# Altium PCB interface_com_usuario.PcbDoc
Units mm, origin at the board's own origin, x right, y up, seen from the top; angles counter-clockwise.
Board outline 65.02 x 100.08 mm, 2 copper layers (Top Layer, Bottom Layer); 31 components, 39 nets, 130 pads, 23 vias.
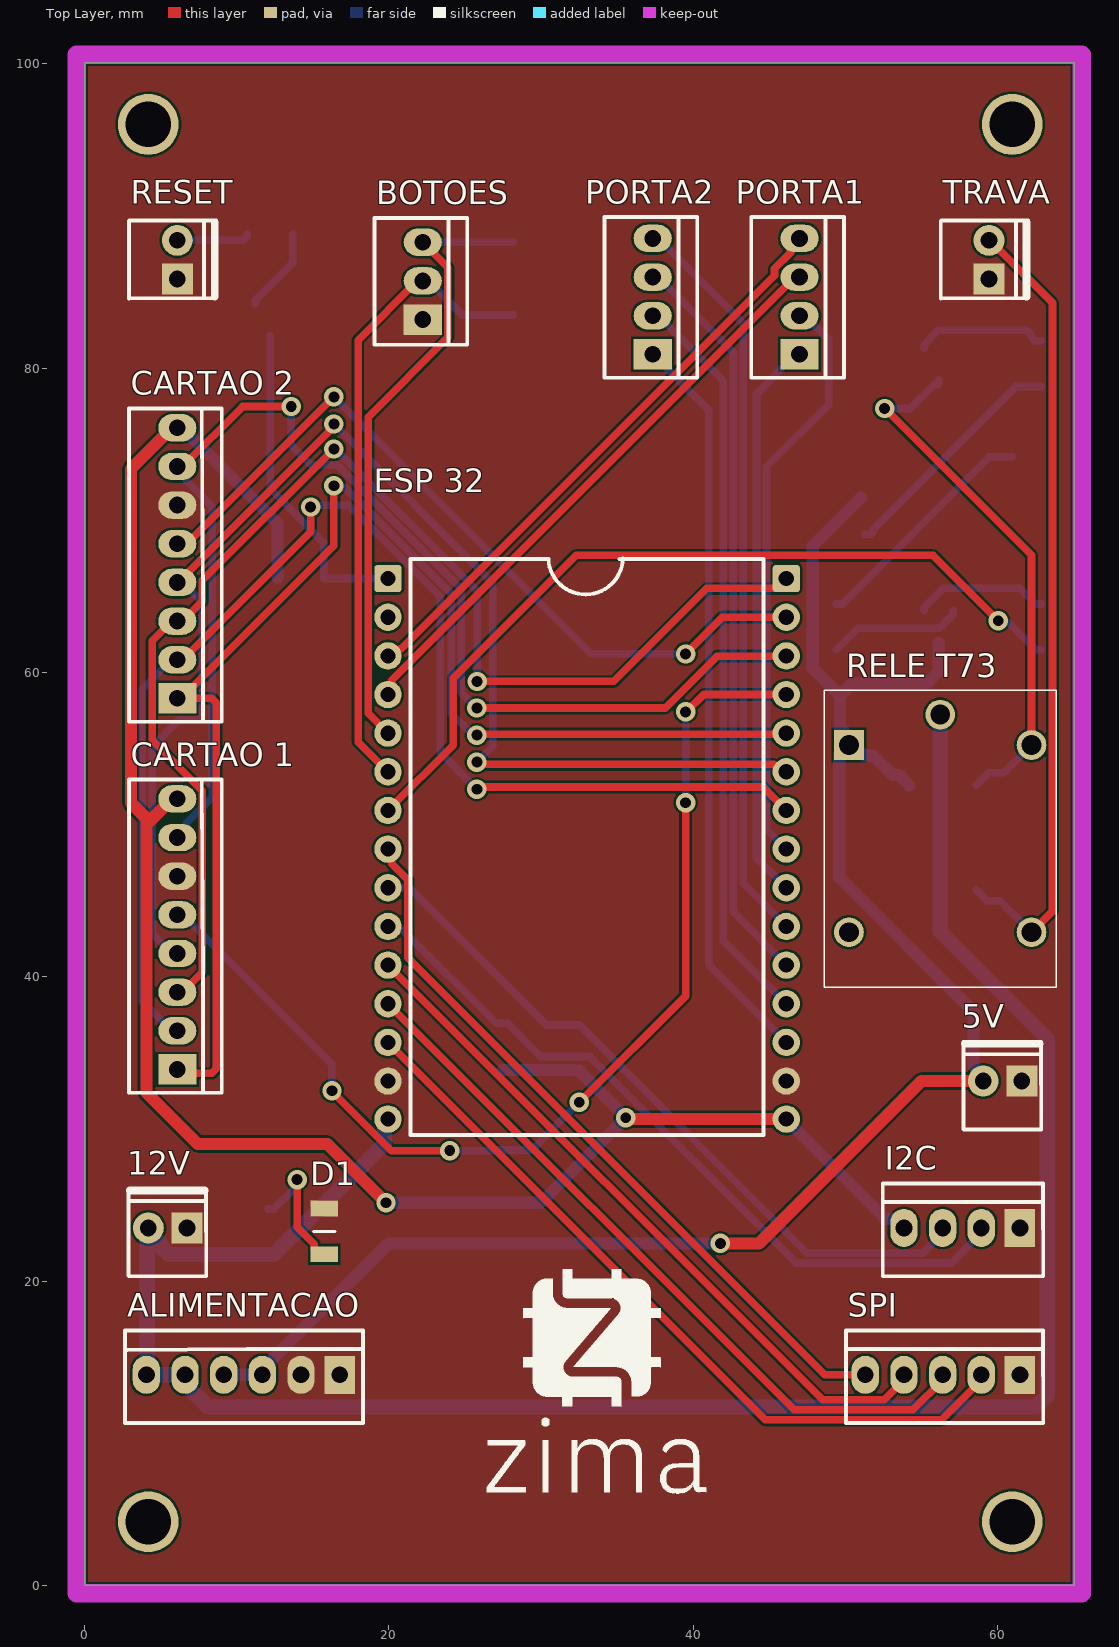
[diagram p0: Top Layer view]
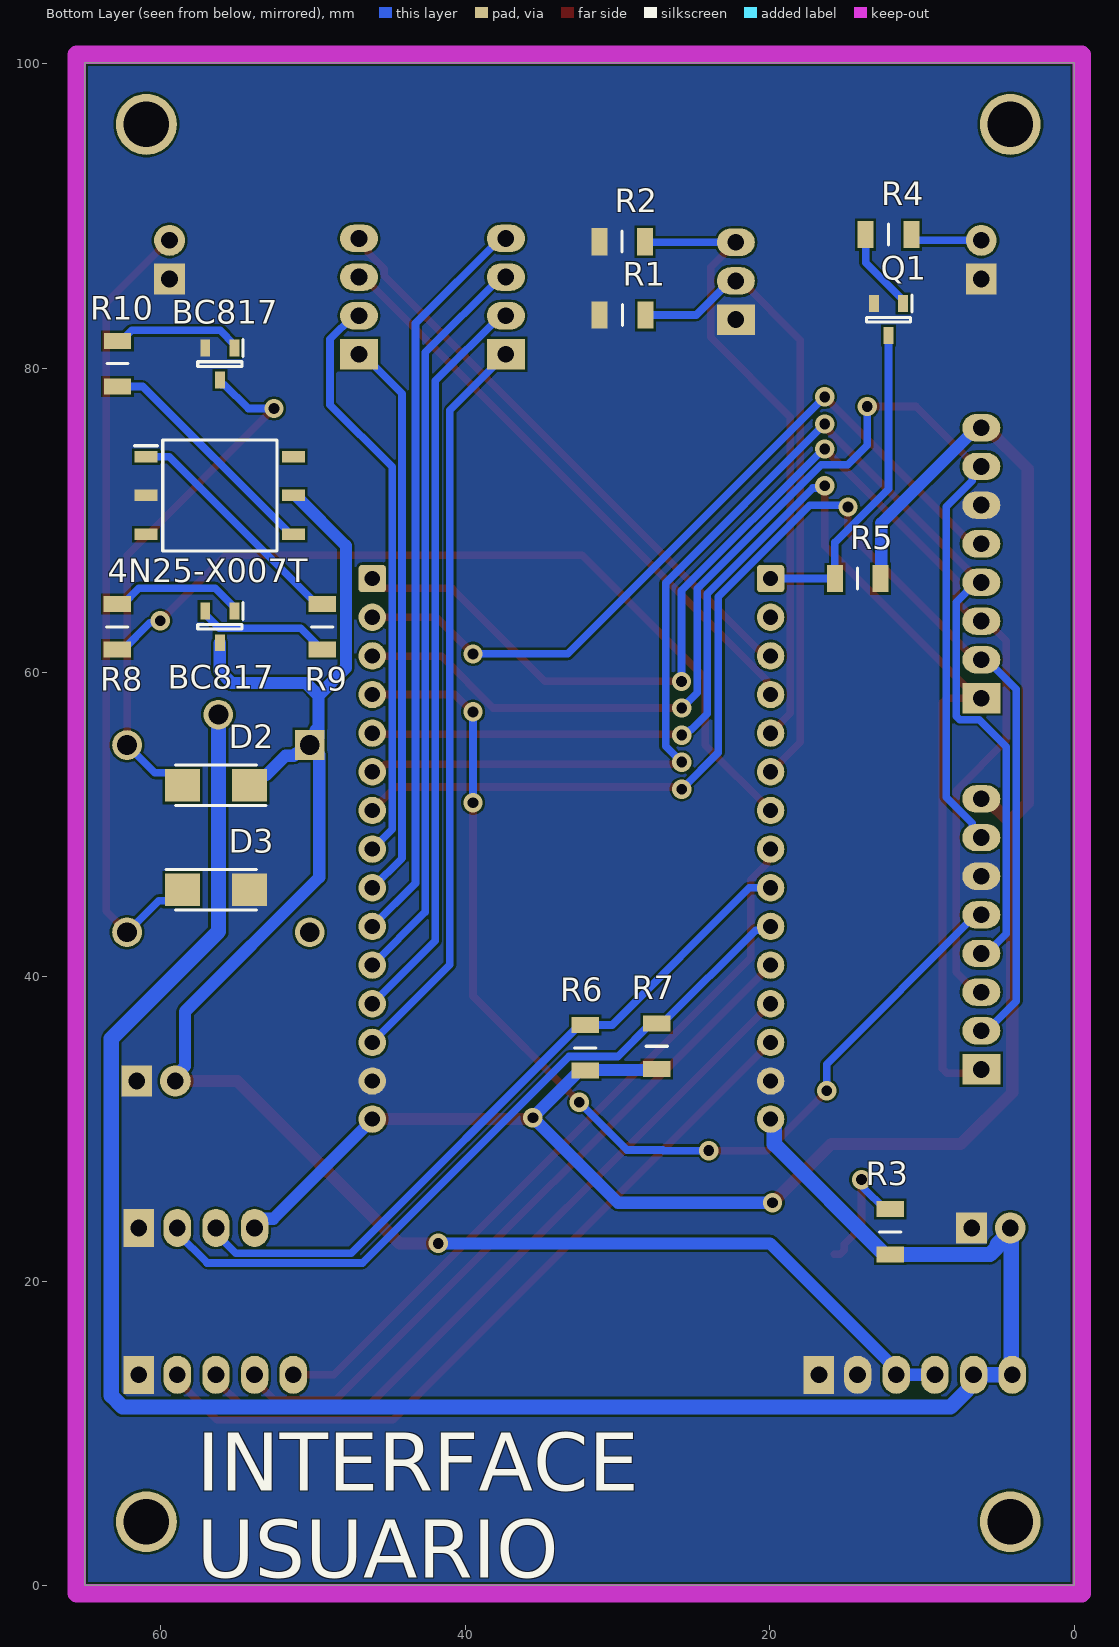
[diagram p1: Bottom Layer view, seen from below]

## Layer stack, top to bottom
Top Solder: solder mask 0.0102, Solder Resist, Dk 3.5
Top Layer: signal copper 0.0356
Dielectric 1: dielectric 0.32, FR-4, Dk 4.8
Bottom Layer: signal copper 0.0356
Bottom Solder: solder mask 0.0102, Solder Resist, Dk 3.5

## Board outline
0,0 65.024,0 65.024,100.076 0,100.076

## Design rules (kind name [scope] priority, off if disabled: settings)
Clearance [All] p1: gap=0.152 ignorepadtopadclearanceinfootprint=FALSE except(0: Arc-Hole Track-Hole SMDPad-Hole THPad-Hole Via-Hole Fill-Hole Poly-Hole Region-Hole Text-Hole)
ComponentClearance [All] p1: gap=0.1 collisioncheckmode=3 verticalgap=0.1 showdistances=FALSE
HoleSize [All] p1: absolutevalues=TRUE maxlimit=3 minlimit=0.025 maxpercent=80.000 minpercent=20.000
MinimumSolderMaskSliver [All] p1: minsoldermaskwidth=0.1
PolygonConnect [All] p1: connectstyle=Direct reliefconductorwidth=0.254 reliefentries=4 polygonreliefangle="90 Angle" airgapwidth=0.254
RoutingVias [All] p1: holewidth=0.4 width=0.8 viastyle="Through Hole" minholewidth=0.3 minwidth=0.6 maxholewidth=0.5 maxwidth=1
SilkToSilkClearance [All] p1: silktosilkclearance=0
SilkToSolderMaskClearance [IsPad] p1: minsilkscreentomaskgap=0 clearancetoexposedcopper=TRUE
SolderMaskExpansion [All] p1: expansion=0.08 istentingtop=FALSE
Width [All] p1: maxlimit=1 minlimit=0.3 preferedwidth=0.5
25 further rules are at their usual default settings.

## Classes and differential pairs
component class U_interface_com_usuario_motor_cartao: 4N25-X007T BC817 D2 D3 PORTA1 PORTA2 R8 R9 R10 "RELE T73" TRAVA
component class U_interface_com_usuario_comunicacao: I2C R6 R7 SPI
component class U_interface_com_usuario_alimentacao: 5V 12V ad ALIMENTACAO D1 Q1 R3 R4 R5 RESET
component class interface_com_usuario: BOTOES "CARTAO 1" "CARTAO 2" "ESP 32" R1 R2

## Components (designator, comment, footprint, x,y, rotation, side; value= is the part's Value field where it differs from the comment)
4N25-X007T "4N25-X007T" SOP254P1030X440-6N 56.134,71.628 r180 bottom
5V "KK_2.54_2vias" KK_2VIAS_180º 61.595,33.147 r180 top
12V "KK_2.54_2vias" KK_2VIAS_180º 6.731,23.495 r180 top
ALIMENTACAO "KK_2.54_6vias" KK_6vias_180° 16.764,13.843 r180 top
BC817 "Trans BC817" SOT96P240X110-3N 56.134,80.264 r270 bottom
BC817 "Trans BC817" SOT96P240X110-3N 56.134,62.992 r270 bottom
BOTOES "KK_2.54_3vias" KK_3vias_180º 22.225,83.185 r90 top
"CARTAO 1" "KK_2.54_8vias" KK_8vias_180° 6.096,33.909 r90 top
"CARTAO 2" "KK_2.54_8vias" KK_8vias_180° 6.096,58.293 r90 top
D1 "LED 3MM RED" "LED RED" 15.748,23.265 r90 top
D2 "1N4007 smd" DIOM5327X242N 56.388,52.578 r0 bottom
D3 "1N4007 smd" DIOM5327X242N 56.388,45.72 r180 bottom
"ESP 32" "microcontrolador" ESP32_Desvikit_v1 19.939,66.167 r0 top value="ESP32 Desvikit V1"
I2C "KK_2.54_4vias" KK_4vias_180° 61.468,23.495 r180 top
PORTA1 "KK_2.54_4vias" KK_4vias_180° 46.99,80.899 r90 top
PORTA2 "KK_2.54_4vias" KK_4vias_180° 37.338,80.899 r90 top
Q1 "Trans BC817" SOT96P240X110-3N 12.192,83.185 r270 bottom
R1 "47k" RESC3216X60N 29.669,83.485 r180 bottom
R2 "47k" RESC3216X60N 29.693,88.311 r180 bottom
R3 "680R" RESC3216X60N 12.072,23.241 r90 bottom
R4 "2k2" RESC3216X60N 12.192,88.773 r180 bottom
R5 "2k2" RESC3216X60N 14.224,66.167 r180 bottom
R6 "4k7" RESC3216X60N 32.124,35.33 r270 bottom
R7 "4k7" RESC3216X60N 27.425,35.433 r270 bottom
R8 "1k" RESC3216X60N 62.872,62.992 r90 bottom
R9 "100R" RESC3216X60N 49.403,62.992 r270 bottom
R10 "1k" RESC3216X60N 62.858,80.288 r270 bottom
"RELE T73" "rele T73" JQC3FT731Z12VDC 50.23,55.226 r270 top
RESET "KK_2.54_2vias" KK_2VIAS_180º 6.096,85.852 r90 top
SPI "KK_2.54_5vias" KK_5vias_180° 61.468,13.843 r180 top
TRAVA "KK_2.54_2vias" KK_2VIAS_180º 59.436,85.852 r90 top

## Footprints (in the part's own frame and the unit in brackets; to place one, negate y for a bottom-side part, rotate by r counter-clockwise, add the part's x,y. Pads: shape width x height; smd on the part's side, far side on the other; paste and mask are expansions set on the pad)
DIOM5327X242N [mm]
  rect 2.3x2.15 smd: 1(-2.2,0) 2(2.2,0)
  silkscreen extent -3.27,-1.34 2.65,1.34, body extent -2.65,-1.34 2.65,1.34, height 2.42
ESP32_Desvikit_v1 [mm]
  rrect25% 1.8x1.8 hole 1: 1(0,0) 30(26.175,0)
  round 1.8 hole 1: 2(0,-2.54) 3(0,-5.08) 4(0,-7.62) 5(0,-10.16) 6(0,-12.7) 7(0,-15.24) 8(0,-17.78) 9(0,-20.32) 10(0,-22.86) 11(0,-25.4) 12(0,-27.94) 13(0,-30.48) 14(0,-33.02) 15(0,-35.52) 16(26.175,-35.52) 17(26.175,-33.02) 18(26.175,-30.48) 19(26.175,-27.94) 20(26.175,-25.4) 21(26.175,-22.86) 22(26.175,-20.32) 23(26.175,-17.78) 24(26.175,-15.24) 25(26.175,-12.7) 26(26.175,-10.16) 27(26.175,-7.62) 28(26.175,-5.08) 29(26.175,-2.54)
  silkscreen extent 1.47,-36.57 24.69,1.31, body extent -1.2,-46.03 27.4,4.9, height 15.1
JQC3FT731Z12VDC [mm]
  rect 1.95x1.95 hole 1.3: 1(0,0)
  round 1.95 hole 1.3: 2(-2,6) 3(0,12) 4(12.3,0) 5(12.3,12)
  silkscreen extent -3.6,-1.62 15.9,13.62, body extent -3.6,-1.62 15.9,13.62, height 15.6
KK_2VIAS_180º [mil]
  rect 80x80 hole 43.31: 1(0,0)
  round 80 hole 43.31: 2(100,0)
  silkscreen extent -50,-101 151,125, body extent -61,-108 165,128, height 464
KK_3vias_180º [mm]
  rect 2x2.5 hole 1.1: 1(0,0)
  oval 1.8x2.5 hole 1.1: 2(2.54,0) 3(5.08,0)
  silkscreen extent -1.65,-2.92 6.69,3.18, body extent -1.6,-2.95 6.69,3.05, height 11.9
KK_4vias_180° [mm]
  rect 2x2.5 hole 1.1: 1(0,0)
  oval 1.8x2.5 hole 1.1: 2(2.54,0) 3(5.08,0) 4(7.62,0)
  silkscreen extent -1.53,-2.92 9.02,3.18, body extent -1.4,-2.79 8.76,3.01, height 10.12
KK_5vias_180° [mm]
  rect 2x2.5 hole 1.1: 1(0,0)
  oval 1.8x2.5 hole 1.1: 2(2.54,0) 3(5.08,0) 4(7.62,0) 5(10.16,0)
  silkscreen extent -1.53,-2.92 11.43,3.18, body extent -1.4,-2.79 11.3,3.01, height 10.12
KK_6vias_180° [mm]
  rect 2x2.5 hole 1.1: 1(0,0)
  oval 1.8x2.5 hole 1.1: 2(2.54,0) 3(5.08,0) 4(7.62,0) 5(10.16,0) 6(12.7,0)
  silkscreen extent -1.53,-2.92 14.11,3.18, body extent -1.4,-2.79 13.84,3.05, height 10.1
KK_8vias_180° [mm]
  rect 2x2.5 hole 1.1: 1(0,0)
  oval 1.8x2.5 hole 1.1: 2(2.54,0) 3(5.08,0) 4(7.62,0) 5(10.16,0) 6(12.7,0) 7(15.24,0) 8(17.78,0)
  silkscreen extent -1.53,-2.92 19.05,3.18, body extent -1.4,-2.74 18.92,3.1, height 10.1
"LED RED" [mm]
  rect 1.05x1.8 smd: 1(-1.5,0) 2(1.5,0)
  silkscreen extent 0,-0.7 0,0.7, body extent -0.79,-0.43 0.81,0.37, height 0.75
RESC3216X60N [mm]
  rect 1.05x1.8 smd: 1(-1.5,0) 2(1.5,0)
  silkscreen extent 0,-0.7 0,0.7, body extent -1.57,-0.8 1.58,0.8, height 0.6
SOP254P1030X440-6N [mm]
  rect 1.5x0.75 smd: 1(-4.85,2.54) 2(-4.85,0) 3(-4.85,-2.54) 4(4.85,-2.54) 5(4.85,0) 6(4.85,2.54)
  silkscreen extent -5.6,-3.65 3.75,3.65, body extent -5.15,-3.65 5.15,3.65, height 4.4
SOT96P240X110-3N [mm]
  rect 1.1x0.65 smd: 1(-1.05,0.96) 2(-1.05,-0.96) 3(1.05,0)
  silkscreen extent -1.6,-1.45 0.15,1.54, body extent -1.2,-1.45 1.2,1.45, height 1.1

## Part data
4N25-X007T: "Phototransistor", Manufacturer_Name=Vishay, Mouser Part Number=782-4N25-X007T, Arrow Part Number=4N25-X007T, Arrow Price/Stock=https://www.arrow.com/en/products/4n25-x007t/vishay, Datasheet Link=https://eu.mouser.com/datasheet/2/427/4n25x000-1767213.pdf, Height=4.4mm, Manufacturer_Part_Number=4N25-X007T, Mouser Price/Stock=https://www.mouser.com/Search/Refine.aspx?Keyword=782-4N25-X007T
5V 12V RESET TRAVA: "Conector KK 2.54mm 2 vias", Descrição="Conector KK 3 vias com passo 2.54mm", Encapsulamento="PTH - 180º", Modelo="2 vias - 180º", Valor="KK 2 vias 180º"
ALIMENTACAO: "Conector KK 2.54mm 6 vias", Descrição="Conector KK 3 vias com passo 2.54mm", Encapsulamento="PTH - 180º", Modelo="3 vias - 180º", Valor="KK 6 vias 180º"
BC817 BC817 Q1: "Transistor BJT NPN BC817-25-7-F", Arrow Part Number=BC817-25-7-F, Manufacturer_Name="Diodes Inc.", Mouser Part Number=621-BC817-25-7-F, Arrow Price/Stock=https://www.arrow.com/en/products/bc817-25-7-f/diodes-incorporated, Datasheet Link=https://www.diodes.com/assets/Datasheets/ds11107.pdf, Height=1.1mm, Manufacturer_Part_Number=BC817-25-7-F, Mouser Price/Stock=https://www.mouser.co.uk/ProductDetail/Diodes-Incorporated/BC817-25-7-F?qs=rGAXPo9uwV0jK0EyLZnqOw%3D%3D
BOTOES: "Conector KK 2.54mm 3 vias", Descrição="Conector KK 3 vias com passo 2.54mm", Encapsulamento="PTH - 180º", Modelo="3 vias - 180º", Valor="KK 3 vias 180º"
"CARTAO 1" "CARTAO 2": "Conector KK 2.54mm 8 vias", Descrição="Conector KK 3 vias com passo 2.54mm", Encapsulamento="PTH - 180º", Modelo="3 vias - 180º", Valor="KK 8 vias 180º"
D1: Current If Luminous Intensity=2, Forward Current If=20, Forward Voltage VF Max=2.5, LED Colour=Red, Manufacturer=Paralight, Manufacturer Part Number=IMP585, Operating Temperature Max=85, Operating Temperature Min=-40, Operating Temperature Range="-40°C to +85", Peak Forward Current=7, Supplier Part Number 1="Led 3mm Vermelho Difuso L-314HD - Paralight", Voltage Vf Typ="2.2V<!--FANDB--><div class=\"features-and-benefits-container\"><div class=\"features-and-benefits-description\"><span class=\"features-benefits-value\">The L-934LID from Kingbright is a through hole round shape high efficiency red colour LED. The device is made of gallium arsenide phosphide on gallium phosphide orange light emitting diode. This LED is widely used because of low power consumption, long life and solid state reliability.</span></div><div class=\"features-and-benefits-list\"><ul class=\"features-and-benefits-list-list\"><li class=\"features-and-benefits-list-item\">Standard bulb size of T-1 (3mm)</li><li class=\"features-and-benefits-list-item\">Reliable and rugged</li><li class=\"features-and-benefits-list-item\">Viewing angle is 60°</li><li class=\"features-and-benefits-list-item\">Luminous intensity of 3mcd at 2mA</li><li class=\"features-and-benefits-list-item\">Forward voltage is 2.0V</li><li class=\"features-and-benefits-list-item\">Forward current (If) is 20mA</li><li class=\"features-and-benefits-list-item\">Dominant wavelength is 625nm at IF=20mA</li><li class=\"features-and-benefits-list-item\">Peak wavelength is 627nm at IF=20", Bulb Size=3mm, ComponentLink1Description=http://loja.multcomercial.com.br/led-3mm-vermelho-difuso-l-314hd-paralight.html, ComponentLink1URL=http://loja.multcomercial.com.br/led-3mm-vermelho-difuso-l-314hd-paralight.html, Dominant Wavelength=625, External Diameter=2.9, External Length / Height=4.6, Forward Current If Max=20, Forward Voltage=2, Lead Cross-section Depth=0.5, Lead Cross-section Width=0.5, Lead Spacing=2.54, LED / Lamp Size="3mm / T-1", LED Mounting="Through Hole", LED Type=Standard, Lens Shape=Round, Luminous Intensity=3, Luminous Intensity @ If Min=0.7, Luminous Intensity Typ=3, Mounting Type="PCB Through Hole", MSL=-, No. of Pins=2, Packaging=Each, Peak Wavelength=625, PIV Max=5, Pricing 1="1=0.15 (BRL)", RoHS=YES, Stock 1=35260, Supplier 1="Mult Comercial", SVHC="No SVHC (15-Jun-2015)", Viewing Angle=60°, Wavelength Typ=625
D2 D3: "Diode smd", Manufacturer_Name=Shikues, Manufacturer_Part_Number=1N4007, Datasheet Link=https://datasheet.lcsc.com/szlcsc/SK-1N4007_C126233.pdf, Height=2.42mm
"ESP 32": library part "ESP32 Desvikit v1", "microcontrolador com moculo bluethoth e wifi"
I2C PORTA1 PORTA2: "Conector KK 2.54mm 4 vias", Descrição="Conector KK 3 vias com passo 2.54mm", Encapsulamento="PTH - 180º", Modelo="3 vias - 180º", Valor="KK 4 vias 180º"
R1 R2 R6 R7 R8 R9 R10: library part "RES 1206", "RES 1206 5%", Arrow Part Number=CRCW12064K70FKEA, Manufacturer_Name=Vishay, Mouser Part Number=71-CRCW1206-4.7K-E3, Arrow Price/Stock=https://www.arrow.com/en/products/crcw12064k70fkea/vishay, Datasheet Link=http://docs-emea.rs-online.com/webdocs/13ec/0900766b813ecc08.pdf, Height=0.6mm, Manufacturer_Part_Number=CRCW12064K70FKEA, Mouser Price/Stock=https://www.mouser.co.uk/ProductDetail/Vishay-Dale/CRCW12064K70FKEA?qs=1vm4qhDHCvlKJmatsKzyFQ%3D%3D
R3 R4 R5: library part "Resistor 1206", "Resistor", Arrow Part Number=CRCW12064K70FKEA, Manufacturer_Name=Vishay, Mouser Part Number=71-CRCW1206-4.7K-E3, Arrow Price/Stock=https://www.arrow.com/en/products/crcw12064k70fkea/vishay, Datasheet Link=http://docs-emea.rs-online.com/webdocs/13ec/0900766b813ecc08.pdf, Height=0.6mm, Manufacturer_Part_Number=CRCW12064K70FKEA, Mouser Price/Stock=https://www.mouser.co.uk/ProductDetail/Vishay-Dale/CRCW12064K70FKEA?qs=1vm4qhDHCvlKJmatsKzyFQ%3D%3D
"RELE T73": "Relay or Contactor", Manufacturer_Name=QIANJI, Manufacturer_Part_Number=JQC-3F-(T73)-1Z-12VDC, Datasheet Link=https://img.ozdisan.com/ETicaret_Dosya/341245_8627675.pdf, Height=15.5mm
SPI: "Conector KK 2.54mm 5 vias", Descrição="Conector KK 3 vias com passo 2.54mm", Encapsulamento="PTH - 180º", Modelo="3 vias - 180º", Valor="KK 5 vias 180º"

## Free pads (board coordinates)
  round 4 hole 3: 1(4.191,96.012) 2(60.96,96.012) 3(4.191,4.191) 4(60.96,4.191)

## Via types
v1: diameter 1.27, hole 0.711, Top Layer to Bottom Layer, 23 vias

## Nets (pads, with @x,y where several pads share a name; then routed paths per layer and width w, separated by ;. In a path a pad name is that pad's centre, name@x,y a point inside that pad or via, vN(x,y) a via of type N, cw(c..) or ccw(c..) an arc to the next point about the centre after c; other vN are vias at no path point)
3V3: "CARTAO 1.8" "CARTAO 2.8" "ESP 32.16" I2C.4 R5.2 R6.2 R7.2 | length 128.3
  Top Layer w0.5: v1(35.56,30.734) v1@35.647,30.647
  Top Layer w0.8: 4.064,50.401 4.064,32.385 7.441,29.008 15.95,29.008 v1(19.812,25.146) ; 6.096,51.689 5.746,51.689 4.261,50.204 3.048,51.417 3.048,73.375 5.746,76.073 6.096,76.073 ; v1@35.647,30.647 46.114,30.647
  Bottom Layer w0.5: R7.2 R7.2@27.476,33.882 ; R6.2 R6.2@32.499,33.83
  Bottom Layer w0.8: 6.398,76.073 12.673,69.799 R5.2@12.673,66.218 ; v1(19.812,25.146) 29.972,25.146 v1(35.56,30.734) 35.56,30.769 R6.2@32.499,33.83 ; R7.2@27.476,33.882 32.072,33.882 R6.2 ; 46.114,30.599 52.616,24.098 53.325,24.098 53.8,23.622 I2C.4@53.8,23.495
+5V: 4N25-X007T.5 5V.2 "RELE T73.1" ALIMENTACAO.3 ALIMENTACAO.4 BC817.3@56.134,61.942 D2.1 | length 116.6
  Top Layer w0.8: v1(41.783,22.479) 44.323,22.479 54.991,33.147 5V.2
  Bottom Layer w0.5: ALIMENTACAO.3 ALIMENTACAO.3@11.684,14.193
  Bottom Layer w0.8: ALIMENTACAO.4@9.162,13.861 9.179,13.843 ALIMENTACAO.3@11.299,13.843 ; ALIMENTACAO.3@11.684,14.193 19.97,22.479 v1(41.783,22.479) ; 49.755,56.18 49.648,56.287 49.648,58.489 ; 4N25-X007T.5@51.034,71.503 47.851,68.32 47.851,60.287 49.648,58.489 ; D2.1 53.513,53.253 53.088,53.253 51.822,54.519 51.274,54.519 51.141,54.651 50.805,54.651 50.23,55.226 49.597,54.593 49.597,46.542 58.422,37.717 58.422,34.114 59.055,33.48 5V.2 ; BC817.3@56.134,61.942 56.134,60.071 55.372,59.309 50.468,59.309 49.648,58.489
  Bottom Layer w1: 49.755,56.18 49.755,55.701 50.23,55.226
+12V: 12V.2 "ESP 32.15" "RELE T73.2" ALIMENTACAO.5 ALIMENTACAO.6 R3.1 | length 139.3
  Bottom Layer w1: 19.939,30.647 19.703,30.411 19.703,28.997 12.447,21.741 5.531,21.741 5.063,22.209 5.063,22.393 4.191,23.265 12V.2 4.127,23.431 4.127,13.906 ALIMENTACAO.6 ALIMENTACAO.5 6.604,13.277 7.004,12.877 7.004,12.855 8.124,11.735 62.533,11.735 63.263,12.466 63.263,35.94 56.23,42.973 56.23,57.226
-motor_d1: "ESP 32.23" PORTA1.2 | length 38.3
  Bottom Layer w0.5: 46.114,48.387 44.812,49.689 44.812,73.514 48.895,77.597 48.895,81.884 47.34,83.439 PORTA1.2
-motor_d2: "ESP 32.3" PORTA1.4 | length 38.9
  Top Layer w0.5: 19.939,61.087 20.291,61.087 20.755,61.551 20.808,61.551 38.755,79.497 45.338,86.08 45.338,86.518 46.391,87.572 46.391,87.92 PORTA1.4
-motor_e1: "ESP 32.19" PORTA2.2 | length 49.1
  Bottom Layer w0.5: PORTA2.2 37.688,83.439 41.971,79.156 41.971,42.37 46.114,38.227
-motor_e2: "ESP 32.21" PORTA2.4 | length 49.1
  Bottom Layer w0.5: PORTA2.4 37.688,88.519 43.275,82.932 43.275,46.146 46.114,43.307
buttom: "ESP 32.6" BOTOES.2 R1.2 | length 41.9
  Top Layer w0.5: 19.939,53.467 17.985,55.421 17.985,81.835 21.875,85.725 BOTOES.2
  Bottom Layer w0.5: BOTOES.2 22.575,85.725 24.815,83.485 R1.2
buttom_2: "ESP 32.5" BOTOES.3 R2.2 | length 41.6
  Top Layer w0.5: 19.939,56.007 18.637,57.309 18.637,76.778 23.877,82.018 23.877,86.613 BOTOES.3
  Bottom Layer w0.5: BOTOES.3 28.147,88.265 R2.2
CLK_IN: "ESP 32.11" SPI.4 | length 46.6
  Top Layer w0.5: 19.939,40.767 48.515,12.191 52.546,12.191 53.848,13.493 SPI.4
EN: "ESP 32.1" Q1.3 R5.1 | length 21.6
  Bottom Layer w0.5: Q1.3 12.192,72.066 15.724,68.534 R5.1 19.939,66.167
GND: 4N25-X007T.2 5V.1 12V.1 "CARTAO 1.6" "CARTAO 2.6" "ESP 32.14" "ESP 32.17" ALIMENTACAO.1 ALIMENTACAO.2 BC817.2@57.094,81.314 BOTOES.1 D1.2 D3.2 I2C.1 Q1.2 R1.1 R2.1 RESET.1 SPI.1 TRAVA.1
MISO: "CARTAO 1.4" "CARTAO 2.4" "ESP 32.25" | length 90.5
  Top Layer w0.5: 6.153,65.913 16.383,76.143 v1(16.383,76.327) ; v1(25.781,54.102) 25.928,53.955 45.275,53.955 45.762,53.467 46.114,53.467
  Bottom Layer w0.5: 6.096,41.529 5.746,41.529 4.444,42.831 4.444,55.117 6.218,56.891 7.512,56.891 7.748,57.126 7.748,64.611 6.446,65.913 6.096,65.913 ; v1(16.383,76.327) 26.835,65.875 26.835,55.156 v1(25.781,54.102)
MISO_IN: "ESP 32.12" SPI.3 | length 48.7
  Top Layer w0.5: 19.939,38.227 46.627,11.539 54.434,11.539 56.388,13.493 SPI.3
MOSI: "CARTAO 1.3" "CARTAO 2.3" "ESP 32.30" | length 85.6
  Top Layer w0.5: 6.096,38.989 6.446,38.989 7.748,40.291 7.748,52.228 4.444,55.532 4.444,62.071 5.746,63.373 6.446,63.373 7.748,64.675 7.748,66.041 v1(16.383,74.676) ; v1(25.798,59.407) 34.769,59.407 40.879,65.517 45.464,65.517 46.114,66.167
  Bottom Layer w0.5: v1(16.383,74.676) 16.491,74.676 25.798,65.369 v1(25.798,59.407)
MOSI_IN: "ESP 32.13" SPI.2 | length 50.7
  Top Layer w0.5: 19.939,35.687 44.739,10.887 56.322,10.887 58.928,13.493 SPI.2
motor_d1: "ESP 32.22" PORTA1.1 | length 37.2
  Bottom Layer w0.5: 46.114,45.847 44.16,47.801 44.16,78.319 46.74,80.899 PORTA1.1
motor_d2: "ESP 32.4" PORTA1.3 | length 38.8
  Top Layer w0.5: 19.939,58.547 20.188,58.796 20.188,59.494 46.672,85.979 PORTA1.3
motor_e1: "ESP 32.18" PORTA2.1 | length 48.8
  Bottom Layer w0.5: PORTA2.1 41.021,77.216 41.021,40.78 46.114,35.687
motor_e2: "ESP 32.20" PORTA2.3 | length 49.1
  Bottom Layer w0.5: PORTA2.3 37.688,85.979 42.623,81.044 42.623,44.258 46.114,40.767
Net4N25-X007T_1: 4N25-X007T.1 R9.1 | length 15.6
  Bottom Layer w0.5: R9.1 49.778,64.492 59.454,74.168 4N25-X007T.1
Net4N25-X007T_4: 4N25-X007T.4 R10.2 | length 15.7
  Bottom Layer w0.5: 4N25-X007T.4 51.659,69.088 51.784,69.213 51.784,69.364 61.208,78.788 R10.2
NetBC817_1: BC817.1@55.174,81.314 R10.1 | length 8.7
  Bottom Layer w0.5: BC817.1@55.174,81.314 55.174,81.539 56.115,82.48 61.915,82.48 62.208,82.187 62.208,82.063 62.483,81.788 R10.1
NetBC817_1: BC817.1@55.174,64.042 R8.2 | length 8.9
  Bottom Layer w0.5: BC817.1@55.174,64.042 55.174,64.267 56.439,65.532 61.457,65.532 62.497,64.492 R8.2
NetBC817_2: BC817.2@57.094,64.042 R9.2 | length 8.9
  Bottom Layer w0.5: R9.2 50.805,62.894 56.171,62.894 57.094,63.817 BC817.2@57.094,64.042
NetBC817_3: "RELE T73.3" BC817.3@56.134,79.214 D2.2 | length 35.3
  Top Layer w0.5: v1(52.578,77.343) 62.23,67.691 62.23,55.226
  Bottom Layer w0.5: v1(52.578,77.343) 54.263,77.343 55.834,78.914 56.059,78.914 56.134,78.989 BC817.3@56.134,79.214 ; D2.2 59.413,53.403 60.407,53.403 62.23,55.226
NetD1_1: D1.1 R3.2 | length 8.8
  Top Layer w0.5: v1(13.97,26.67) 13.97,23.543 15.098,22.415 15.098,22.04 15.373,21.765 D1.1
  Bottom Layer w0.5: R3.2 12.447,24.741 13.823,26.117 13.823,26.523 v1(13.97,26.67)
NetD3_1: "RELE T73.5" D3.1 TRAVA.2 | length 52.6
  Top Layer w0.5: TRAVA.2 59.497,88.392 63.607,84.282 63.607,44.303 62.23,42.926
  Bottom Layer w0.5: D3.1 59.307,45.001 60.155,45.001 62.23,42.926
NetQ1_1: Q1.1 R4.1 | length 5.6
  Bottom Layer w0.5: Q1.1 11.232,84.46 13.692,86.92 R4.1
NetR4_2: R4.2 RESET.2 | length 4.8
  Bottom Layer w0.5: RESET.2 10.417,88.392 10.692,88.667 R4.2
RST: "CARTAO 1.7" "CARTAO 2.7" "ESP 32.28" | length 83.2
  Top Layer w0.5: 6.096,73.533 6.446,73.533 10.383,77.47 v1(13.589,77.47) ; v1(25.781,57.658) 38.157,57.658 41.562,61.062 46.089,61.062 46.114,61.087
  Bottom Layer w0.5: 6.096,73.533 6.695,72.934 6.695,72.586 8.4,70.88 8.4,51.802 6.695,50.096 6.695,48.711 ; v1(13.589,77.47) 13.589,74.93 14.88,73.639 16.606,73.639 24.761,65.484 24.761,58.678 v1(25.781,57.658)
sc1: "CARTAO 1.5" "ESP 32.27" | length 70.8
  Top Layer w0.5: v1(16.256,32.512) 16.256,32.489 20.17,28.575 v1(24.003,28.575) ; v1(32.512,31.75) 39.497,38.735 v1(39.497,51.435) ; v1(39.497,57.404) 39.551,57.404 40.694,58.547 46.114,58.547
  Bottom Layer w0.5: 6.096,44.069 6.446,44.069 16.256,34.259 v1(16.256,32.512) ; v1(24.003,28.575) 26.997,28.575 27.035,28.613 29.375,28.613 30.634,29.872 v1(32.512,31.75) ; v1(39.497,51.435) v1(39.497,57.404)
sc2: "CARTAO 2.5" "ESP 32.29" | length 52
  Top Layer w0.5: 6.096,68.453 6.731,68.453 v1(16.383,78.105) ; v1(39.497,61.214) 41.91,63.627 46.114,63.627
  Bottom Layer w0.5: v1(16.383,78.105) 33.274,61.214 v1(39.497,61.214)
SCK: "CARTAO 1.2" "CARTAO 2.2" "ESP 32.24" | length 86.3
  Top Layer w0.5: 6.096,60.833 6.446,60.833 14.859,69.246 v1(14.859,70.866) ; v1(25.781,52.324) 25.989,52.324 26.137,52.472 44.569,52.472 46.114,50.927
  Bottom Layer w0.5: 6.096,36.449 5.746,36.449 3.792,38.403 3.792,58.879 5.746,60.833 6.096,60.833 ; v1(14.859,70.866) 14.969,70.976 17.367,70.976 23.368,64.975 23.368,54.737 v1(25.781,52.324)
SCL_IN: "ESP 32.10" I2C.2 R7.1 | length 49.3
  Bottom Layer w0.5: 19.939,43.307 20.188,43.058 20.925,43.058 27.05,36.933 27.8,36.933 29.976,34.757 33.191,34.757 46.757,21.191 56.974,21.191 58.928,23.145 I2C.2
SDA: "CARTAO 1.1" "CARTAO 2.1" "ESP 32.26" | length 88.8
  Top Layer w0.5: 6.096,33.909 6.346,33.659 8.35,33.659 8.643,33.952 8.643,58 8.35,58.293 6.096,58.293 ; 6.346,58.293 16.383,68.33 v1(16.383,72.263) ; v1(25.781,55.88) 25.845,55.944 46.05,55.944 46.114,56.007
  Bottom Layer w0.5: v1(16.383,72.263) 16.53,72.116 17.165,72.116 24.109,65.172 24.109,57.282 25.167,56.224 25.228,56.224 25.573,55.88 v1(25.781,55.88)
SDA_IN: "ESP 32.9" I2C.3 R6.1 | length 47.3
  Bottom Layer w0.5: 19.939,45.847 21.336,45.847 30.353,36.83 R6.1 32.499,36.83 47.486,21.843 55.086,21.843 56.388,23.145 I2C.3
SS: "ESP 32.8" SPI.5 | length 49.1
  Top Layer w0.5: 19.939,48.387 20.188,48.138 20.188,47.44 21.241,46.386 21.241,41.243 48.641,13.843 SPI.5
trava: "ESP 32.7" R8.1 | length 55
  Top Layer w0.5: 19.939,50.927 24.236,55.224 24.236,59.612 32.315,67.691 55.753,67.691 v1(60.045,63.399)
  Bottom Layer w0.5: v1(60.045,63.399) 60.192,63.252 60.737,63.252 62.497,61.492 R8.1
pads on no net: 4N25-X007T.3 4N25-X007T.6 "ESP 32.2" "RELE T73.4"

## Polygon pours and split planes (outlines as drawn)
GND on Bottom Layer "GND_L02_P003" (solid, pour order 3): 0,100.076 65.024,100.076 65.024,-0.127 64.897,0 0,0
GND on Top Layer "GND_L01_P002" (solid, pour order 2): 0,100.076 0,0 65.024,0 65.024,100.076

## Keep-outs
Keep-Out Layer:
  lines w1.2: -0.508,-0.508 -0.508,100.584 65.532,100.584 65.532,-0.508 -0.508,-0.508

## Silkscreen, mask and mechanical layers (free items; w line width, h text height)
Top Overlay:
  drawing of 7 lines, arcs and shapes, not listed
Bottom Overlay:
  text "INTERFACE / USUARIO" at 57.658,0.508 h3.81